# Altium PCB board.PcbDoc
Units mil, origin at the board's own origin, x right, y up, seen from the top; angles counter-clockwise.
Board outline 1900 x 3300 mil, 2 copper layers (Top Layer, Bottom Layer); 33 components, 41 nets, 131 pads, 0 vias.
Unrouted connection lines stored in the file: 56.
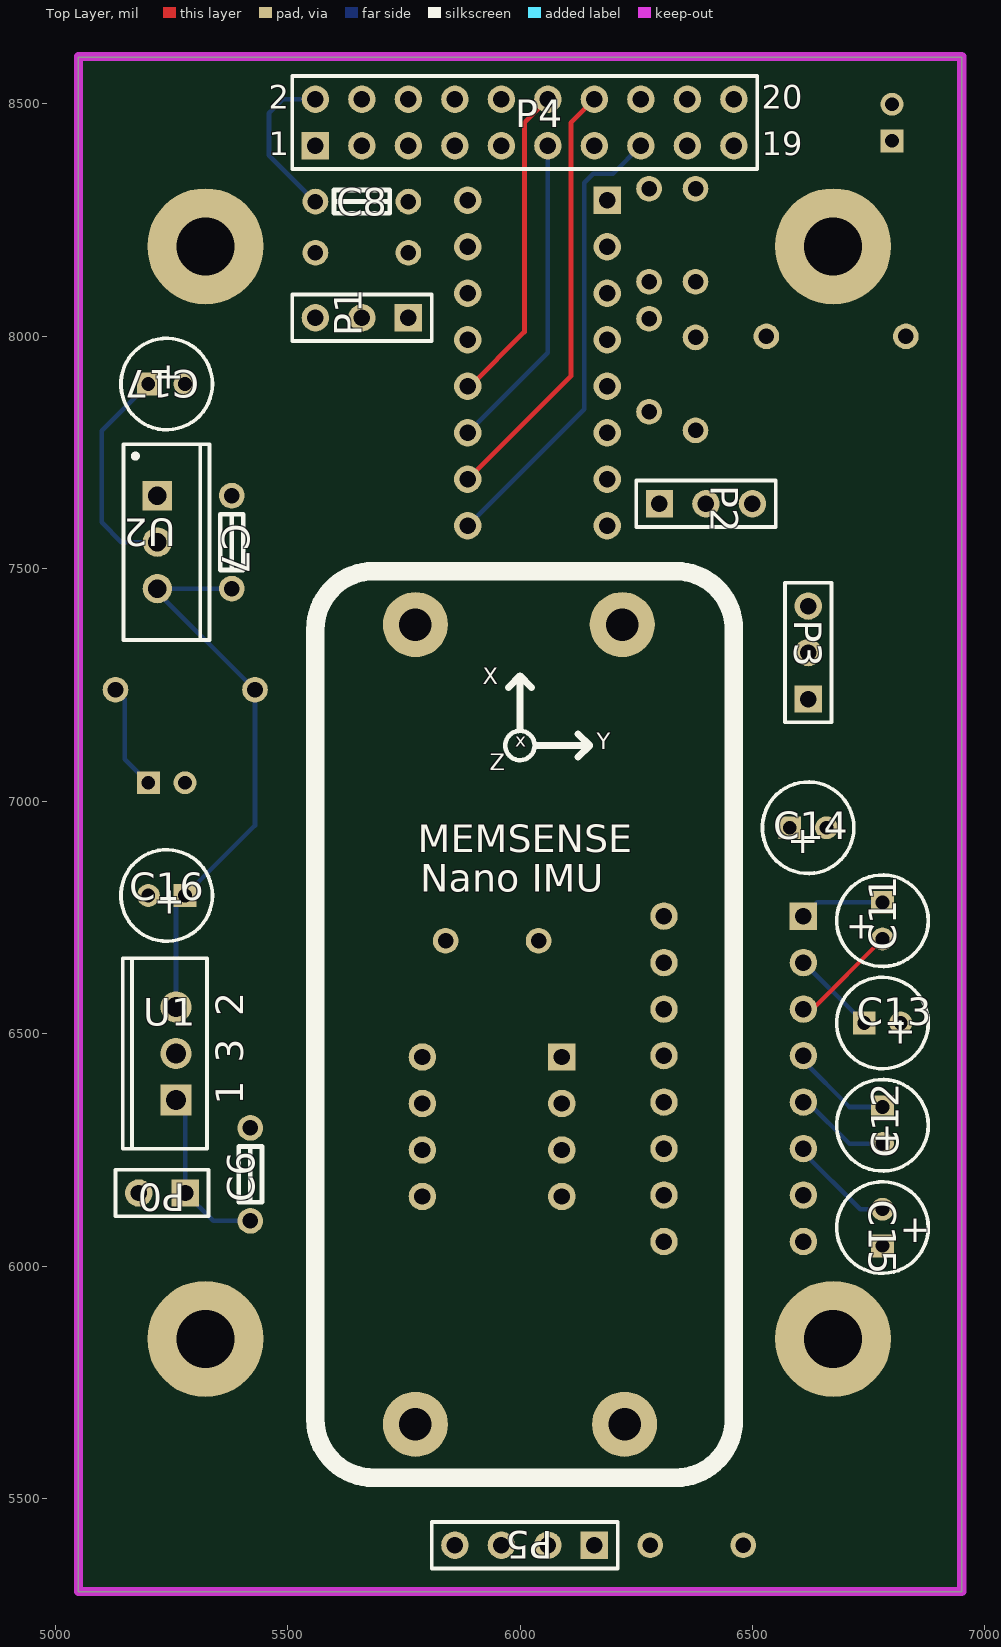
[diagram p0: Top Layer view]
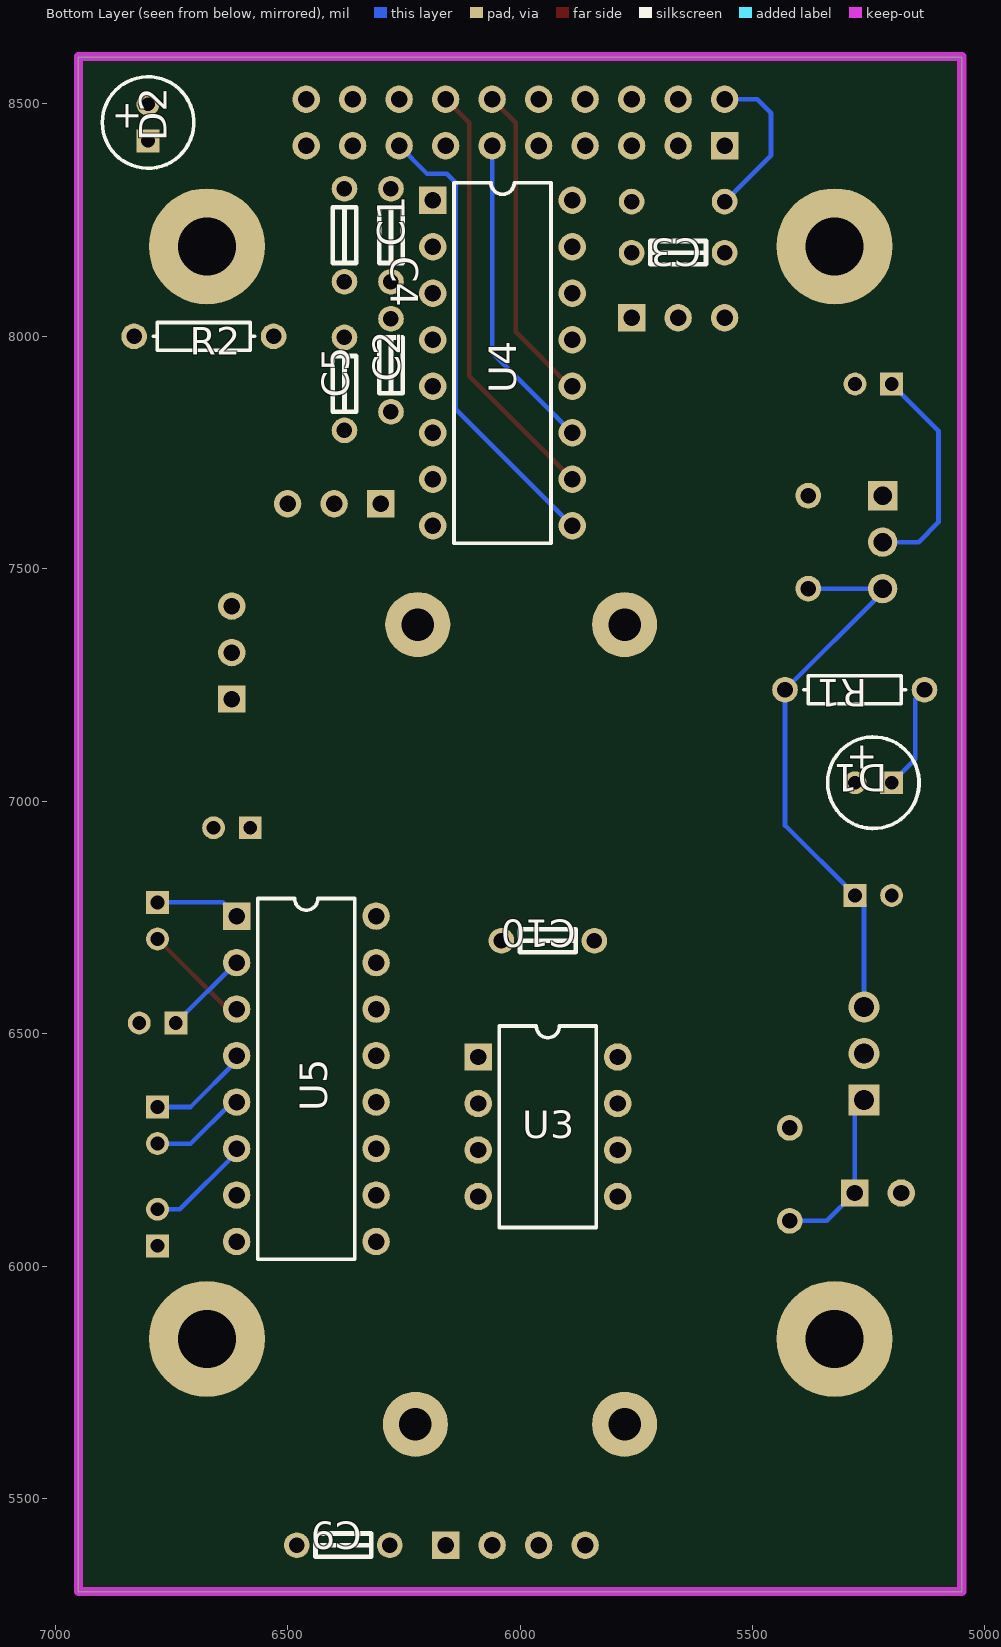
[diagram p1: Bottom Layer view, seen from below]

## Layer stack, top to bottom
Top Layer: signal copper 1.4
Dielectric: dielectric 12.6, FR-4, Dk 4.8
Bottom Layer: signal copper 1.4

## Board outline
5050,5300 6950,5300 6950,8600 5050,8600

## Design rules (kind name [scope] priority, off if disabled: settings)
Clearance [All] p1: gap=15
PolygonConnect [All] p1: connectstyle=Relief reliefconductorwidth=10 reliefentries=4 polygonreliefangle="90 Angle"
RoomDefinition schematic [InComponentClass('schematic')] p1: confinementstyle=ConfineIn formatcopy=TRUE lockcomponents=FALSE outline 7260,4940 7260,8810 4800,8810 4800,4940
RoutingLayers RoutingLayers_1 [InNet('GND')] p1: top layer_v5=TRUE bottom layer_v5=FALSE
RoutingLayers [All] p2: top layer_v5=FALSE bottom layer_v5=TRUE
RoutingTopology RoutingTopology_1 [(InNet('3.3V') OR InNet('5V') OR InNet('12V'))] p1: topology=Starburst
RoutingTopology [All] p2: topology=Shortest
RoutingVias [All] p1: holewidth=28 width=50 viastyle="Through Hole" minholewidth=28 minwidth=50 maxholewidth=28 maxwidth=50
SilkscreenOverComponentPads [All] p1: minsilkscreentomaskgap=10
SolderMaskExpansion [All] p1: expansion=4
TestPointUsage [All] p1: valid=0 allowmultiple=FALSE
Testpoint [All] p1: side=15 testpointundercomponent=TRUE minsize=40 maxsize=100 preferedsize=60 minholesize=0 maxholesize=40 preferedholesize=32 testpointgrid=1 style=1023 order=0123456789
Width Width_1 [(InNet('3.3V') OR InNet('5V') OR InNet('12V'))] p1: maxlimit=20 minlimit=10 preferedwidth=15
Width [All] p2: maxlimit=20 minlimit=10 preferedwidth=12
21 further rules are at their usual default settings.

## Components (designator, comment, footprint, x,y, rotation, side; value= is the part's Value field where it differs from the comment)
C1 "Cap" C_NANO_HOLES 6277.56,8117.72 r90 bottom
C2 "Cap" C_NANO_HOLES 6277.56,7837.72 r90 bottom
C3 "Cap" C_NANO_HOLES 5560,8180 r0 bottom
C4 "Cap" C_NANO_HOLES 6377.56,8117.72 r90 bottom
C5 "Cap" C_NANO_HOLES 6377.56,7997.72 r270 bottom
C6 "Cap" C_NANO_HOLES 5420,6097.48 r90 top
C7 "Cap" C_NANO_HOLES 5380,7457.48 r90 top
C8 "Cap" C_NANO_HOLES 5760,8290 r180 top
C9 "Cap" C_NANO_HOLES 6480,5400 r180 bottom
C10 "Cap" C_NANO_HOLES 6040,6700 r180 bottom
C11 "Cap Pol" B 6779.69,6743.15 r270 top
C12 "Cap Pol" B 6779.69,6303.15 r270 top
C13 "Cap Pol" B 6779.69,6523.15 r0 top
C14 "Cap Pol" B 6619.69,6943.15 r0 top
C15 "Cap Pol" B 6779.69,6083.15 r90 top
C16 "Cap Pol1" B 5240,6797.48 r180 top
C17 "Cap Pol1" B 5240,7897.48 r0 top
D1 "LED" B 5240,7040 r0 bottom
D2 "LED" B 6800,8460 r90 bottom
P0 "Header 2" HDR1X2 5280,6157.48 r180 top
P1 "MHDR1X3" HDR1X3 5760,8040 r180 top
P2 "MHDR1X3" HDR1X3 6300,7640 r0 top
P3 "MHDR1X3" HDR1X3 6620,7220 r90 top
P4 "Header 10X2" HDR2X10 5560,8410 r0 top
P5 "Header 4" HDR1X4 6160,5400 r180 top
R1 "Res" AXIAL-0.3 5280,7240 r0 bottom
R2 "Res" AXIAL-0.3 6680,8000 r180 bottom
U1 "L7805ACV" TO220ABN 5260,6457.48 r90 top
U2 "LD33V" T03B 5220,7557.48 r270 top
U3 "SN75176AP" P008 5940,6300 r270 bottom
U4 "MAX3232EEPE" PE16 6037.56,7942.72 r270 bottom
U5 "MAX232ACPE" PE16A 6459.69,6403.15 r270 bottom
? "Comment" MEMSENSE_NANO_IMU 6000,6520 r0 top

## Footprints (in the part's own frame and the unit in brackets; to place one, negate y for a bottom-side part, rotate by r counter-clockwise, add the part's x,y. Pads: shape width x height; smd on the part's side, far side on the other; paste and mask are expansions set on the pad)
AXIAL-0.3 [mm] "Resistor; 2 Leads"
  round 1.4 hole 0.85: 1(-3.81,0) 2(3.81,0)
  silkscreen extent -2.77,-0.76 2.77,0.76
B [mm] "Capacitor, Electrolytic, Radial; Body 5 x 6.8 mm (Dia.xH typ); Pin Spacing 2 mm (typ)"
  rect 1.25x1.25 hole 0.75: 1(-1,0)
  round 1.25 hole 0.75: 2(1,0)
  silkscreen extent -2.5,-2.5 2.5,2.5
C_NANO_HOLES [mm] "C_NANO com furos maiores"
  round 1.4 hole 0.85: 1(0,0) 2(5.08,0)
  silkscreen extent 1.02,-0.63 4.06,0.64
HDR1X2 [mm] "Connector; Header; 2 Position"
  rect 1.5x1.5 hole 0.9: 1(0,0)
  round 1.5 hole 0.9: 2(2.54,0)
  silkscreen extent -1.27,-1.27 3.81,1.27
HDR1X3 [mm] "Connector; Header; 3 Position"
  rect 1.5x1.5 hole 0.9: 1(0,0)
  round 1.5 hole 0.9: 2(2.54,0) 3(5.08,0)
  silkscreen extent -1.27,-1.27 6.35,1.27
HDR1X4 [mm] "Connector; Header; 4 Position"
  rect 1.5x1.5 hole 0.9: 1(0,0)
  round 1.5 hole 0.9: 2(2.54,0) 3(5.08,0) 4(7.62,0)
  silkscreen extent -1.27,-1.27 8.89,1.27
HDR2X10 [mm] "Connector; Header; 10x2 Position"
  rect 1.5x1.5 hole 0.9: 1(0,0)
  round 1.5 hole 0.9: 2(0,2.54) 3(2.54,0) 4(2.54,2.54) 5(5.08,0) 6(5.08,2.54) 7(7.62,0) 8(7.62,2.54) 9(10.16,0) 10(10.16,2.54) 11(12.7,0) 12(12.7,2.54) 13(15.24,0) 14(15.24,2.54) 15(17.78,0) 16(17.78,2.54) 17(20.32,0) 18(20.32,2.54) 19(22.86,0) 20(22.86,2.54)
  silkscreen extent -1.27,-1.27 24.13,3.81
MEMSENSE_NANO_IMU [mil]
  round 140 hole 70: 0(-225,860) 1(220,860) 2(-225,-860) 3(225,-860)
  silkscreen extent -440,-975 460,975
P008 [mm] "DIP; 8 Leads; Row Spacing 7.62 mm; Pitch 2.54 mm"
  rect 1.5x1.5 hole 0.9: 1(-3.81,-3.81)
  round 1.5 hole 0.9: 2(-1.27,-3.81) 3(1.27,-3.81) 4(3.81,-3.81) 5(3.81,3.81) 6(1.27,3.81) 7(-1.27,3.81) 8(-3.81,3.81)
  silkscreen extent -5.5,-2.65 5.5,2.65
PE16 [mm] "DIP; 16 Leads; Row Spacing 7.62 mm; Pitch 2.54 mm"
  rect 1.5x1.5 hole 0.9: 1(-8.89,-3.81)
  round 1.5 hole 0.9: 2(-6.35,-3.81) 3(-3.81,-3.81) 4(-1.27,-3.81) 5(1.27,-3.81) 6(3.81,-3.81) 7(6.35,-3.81) 8(8.89,-3.81) 9(8.89,3.81) 10(6.35,3.81) 11(3.81,3.81) 12(1.27,3.81) 13(-1.27,3.81) 14(-3.81,3.81) 15(-6.35,3.81) 16(-8.89,3.81)
  silkscreen extent -9.85,-2.65 9.85,2.65
PE16A [mm] "DIP; 16 Leads; Row Spacing 7.62 mm; Pitch 2.54 mm"
  rect 1.5x1.5 hole 0.9: 1(-8.89,-3.81)
  round 1.5 hole 0.9: 2(-6.35,-3.81) 3(-3.81,-3.81) 4(-1.27,-3.81) 5(1.27,-3.81) 6(3.81,-3.81) 7(6.35,-3.81) 8(8.89,-3.81) 9(8.89,3.81) 10(6.35,3.81) 11(3.81,3.81) 12(1.27,3.81) 13(-1.27,3.81) 14(-3.81,3.81) 15(-6.35,3.81) 16(-8.89,3.81)
  silkscreen extent -9.85,-2.65 9.85,2.65
T03B [mm] "TO, Thru-Hole, Vertical, Heatsink Mounted; 3 In-Line Leads; Pitch 2.54 mm"
  rect 1.6x1.6 hole 1: 1(-2.54,0)
  round 1.6 hole 1: 2(0,0) 3(2.54,0)
  silkscreen extent -5.35,-1.85 5.35,2.85, body extent -5.4,-1.9 5.4,2.9, height 19.4
TO220ABN [mm] "TO, Thru-Hole, Vertical, Heatsink Mounted; 3 In-Line Leads; Pitch 2.54 mm; Pin sequence 1, 3, 2"
  rect 1.7x1.7 hole 1.1: 1(-2.54,0)
  round 1.7 hole 1.1: 2(2.54,0) 3(0,0)
  silkscreen extent -5.2,-1.7 5.2,2.9

## Part data
C1 C2 C3 C4 C5 C6 C7 C8 C9 C10: "Capacitor"
C11 C12 C13 C14 C15: library part "Cap Pol1", "Polarized Capacitor (Radial)"
C16 C17: "Polarized Capacitor (Radial)"
D1 D2: library part LED0, "Typical INFRARED GaAs LED"
P0: "Header, 2-Pin"
P1 P2 P3: "Header, 3-Pin"
P4: "Header, 10-Pin, Dual row"
P5: "Header, 4-Pin"
R1 R2: library part Res1, "Resistor"
U1: "Precision 1A Regulator"
U2: library part LM1117T-3.3, "800mA Low-Dropout Linear Regulator"
U3: "Differential Bus Transceiver"
U4: "±15kV ESD-Protected, 3.0V to 5.5V, Low-Power, up to 250kbps, True RS-232 Transceiver"
U5: "+5V Powered, Multi-Channel RS-232 Driver/Receiver"

## Free pads (board coordinates)
  round 250 hole 125: 0(5323.39,8193.58) 1(6673.39,8193.58) 2(6673.39,5843.58) 3(5323.39,5843.58)

## Nets (pads, with @x,y where several pads share a name; then routed paths per layer and width w, separated by ;. In a path a pad name is that pad's centre, name@x,y a point inside that pad or via, vN(x,y) a via of type N, cw(c..) or ccw(c..) an arc to the next point about the centre after c; other vN are vias at no path point)
3.3V: C8.2 C17.1 P4.2 U2.2 | length 793.1
  Bottom Layer w10: U2.2@5192.52,7557.48 5142.52,7557.48 5100,7600 5100,7796.85 C17.1 ; C8.2 5460,8390 5460,8480 5490,8510 P4.2
5V: C3.2 C7.1 C9.2 C10.2 C14.1 C16.1 P5.1 R1.2 U1.2 U2.3 U3.8 U4.16 U5.16 | length 1209.9
  Bottom Layer w10: U2.3@5220,7450 R1.2 5430,6948.11 C16.1 5260,6778.11 U1.2 ; U2.3 C7.1
12V: C6.1 P0.1 U1.1 | length 373.1
  Bottom Layer w10: U1.1 5280,6337.48 P0.1 5340,6097.48 C6.1
GND: C3.1 C4.1 C5.1 C6.2 C7.2 C8.1 C9.1 C10.1 C13.2 C14.2 C15.1 C16.2 C17.2 D1.2 D2.2 P0.2 P1.3 P2.3 P3.3 P4.10 P4.13 P4.16 P4.18 P5.2 U1.3 U2.1 U3.2 U3.3 U3.4 U3.5 U4.15 U5.15
GPS_CAN2_RX: P4.8
GPS_CAN2_TX: P4.20
GPS_COM1_RX: P4.12 U4.12 | length 691.7
  Top Layer w10: U4.12 5892.72,7892.72 6009.53,8009.53 6009.53,8459.53 P4.12
GPS_COM1_TX: P4.11 U4.11 | length 688.7
  Bottom Layer w10: U4.11 6060,7965.16 P4.11
GPS_COM2_RX: P4.15 U4.9 | length 996.4
  Bottom Layer w10: U4.9 6138.03,7843.19 6138.03,8330.53 6157.5,8350 6200,8350 P4.15
GPS_COM2_TX: P4.14 U4.10 | length 930.1
  Top Layer w10: U4.10 6109.53,7914.69 6109.53,8459.53 P4.14
GPS_EVENT1: P4.9
GPS_EVENT2: P4.7
GPS_LNA_PWR: P4.1
GPS_PPS: P4.19
GPS_PV: P4.17 R2.2
GPS_RESETIN: P4.5
GPS_USB_D+: P4.4
GPS_USB_D-: P4.3
GPS_VARF: P4.6
IMU_HRS_A: P5.3 U3.6
IMU_HRS_B: P5.4 U3.7
IMU_TX: U3.1 U5.11
J1_RX: P1.2 U4.13
J1_TX: P1.1 U4.14
J2_RX: P2.2 U4.8
J2_TX: P2.1 U4.7
J3_RX: P3.2 U5.14
NetC1_1: C1.1 U4.3
NetC1_2: C1.2 U4.1
NetC2_1: C2.1 U4.5
NetC2_2: C2.2 U4.4
NetC4_2: C4.2 U4.2
NetC5_2: C5.2 U4.6
NetC11_1: C11.1 U5.1 | length 182.2
  Bottom Layer w10: U5.1 6639.06,6782.52 C11.1
NetC11_2: C11.2 U5.3 | length 213
  Top Layer w10: U5.3@6629.06,6553.15 C11.2
NetC12_1: C12.1 U5.4 | length 238.1
  Top Layer w10: C12.1@6764.25,6342.52 C12.1
  Bottom Layer w10: U5.4 6609.69,6441.5 6708.66,6342.52 C12.1
NetC12_2: C12.2 U5.5 | length 222.5
  Top Layer w10: C12.2@6764.25,6263.78 C12.2
  Bottom Layer w10: U5.5 6619.29,6353.15 6708.66,6263.78 C12.2
NetC13_1: C13.1 U5.2 | length 199.3
  Top Layer w10: C13.1@6724.88,6523.15 C13.1
  Bottom Layer w10: U5.2@6610.32,6653.15 C13.1
NetC15_2: C15.2 U5.6 | length 244.5
  Top Layer w10: C15.2@6764.25,6122.52 C15.2
  Bottom Layer w10: U5.6 6609.69,6244.64 6731.81,6122.52 C15.2
NetD1_1: D1.1 R1.1 | length 229.3
  Bottom Layer w10: R1.1 5150,7220 5150,7090.63 D1.1
NetD2_1: D2.1 R2.1
pads on no net: ?.0 ?.1 ?.2 ?.3 P3.1 U5.7 U5.8 U5.9 U5.10 U5.12 U5.13

## Keep-outs
Keep-Out Layer:
  lines w19.68: 5050,5300 5050,6244.29 5050,7751.77 5050,8602.36 6950,8602.36 6950,5300 5050,5300

## Text inside footprints (layer, text, board x,y; h text height)
C11: Top Overlay "+" at 6709.69,6763.15 h59.06 r270
C12: Top Overlay "+" at 6764.69,6308.15 h59.06 r270
C13: Top Overlay "+" at 6784.69,6478.15 h59.06
C14: Top Overlay "+" at 6574.69,6888.15 h59.06
C15: Top Overlay "+" at 6874.69,6043.15 h59.06 r90
C16: Top Overlay "+" at 5280,6807.48 h59.06 r180
C17: Top Overlay "+" at 5210,7887.48 h59.06
D1: Bottom Overlay "+" at 5230,7120 h59.06 r180
D2: Bottom Overlay "+" at 6820,8440 h59.06 r270
P4: Top Overlay "20" at 6520,8490 h50; Top Overlay "19" at 6520,8390 h50; Top Overlay "1" at 5460,8390 h50; Top Overlay "2" at 5460,8490 h50
U1: Top Overlay "1" at 5404.69,6347.64 h59.06 r90; Top Overlay "2" at 5404.69,6537.8 h59.06 r90; Top Overlay "3" at 5404.69,6437.8 h59.06 r90
?: Top Overlay "Z" at 5935,7055 h60; Top Overlay "Y" at 6165,7100 h60; Top Overlay "X" at 5920,7240 h60; Top Overlay "x" at 5990,7108 h50; Top Overlay "MEMSENSE" at 5780,6890 h60; Top Overlay "Nano IMU" at 5785.07,6805 h60